# Altium PCB PCB1.PcbDoc
Units mil, origin at the board's own origin, x right, y up, seen from the top; angles counter-clockwise.
Board outline 1605 x 1345 mil, 2 copper layers (Top Layer, Bottom Layer), stack 67.356 mil thick; 9 components, 11 nets, 32 pads, 2 vias.
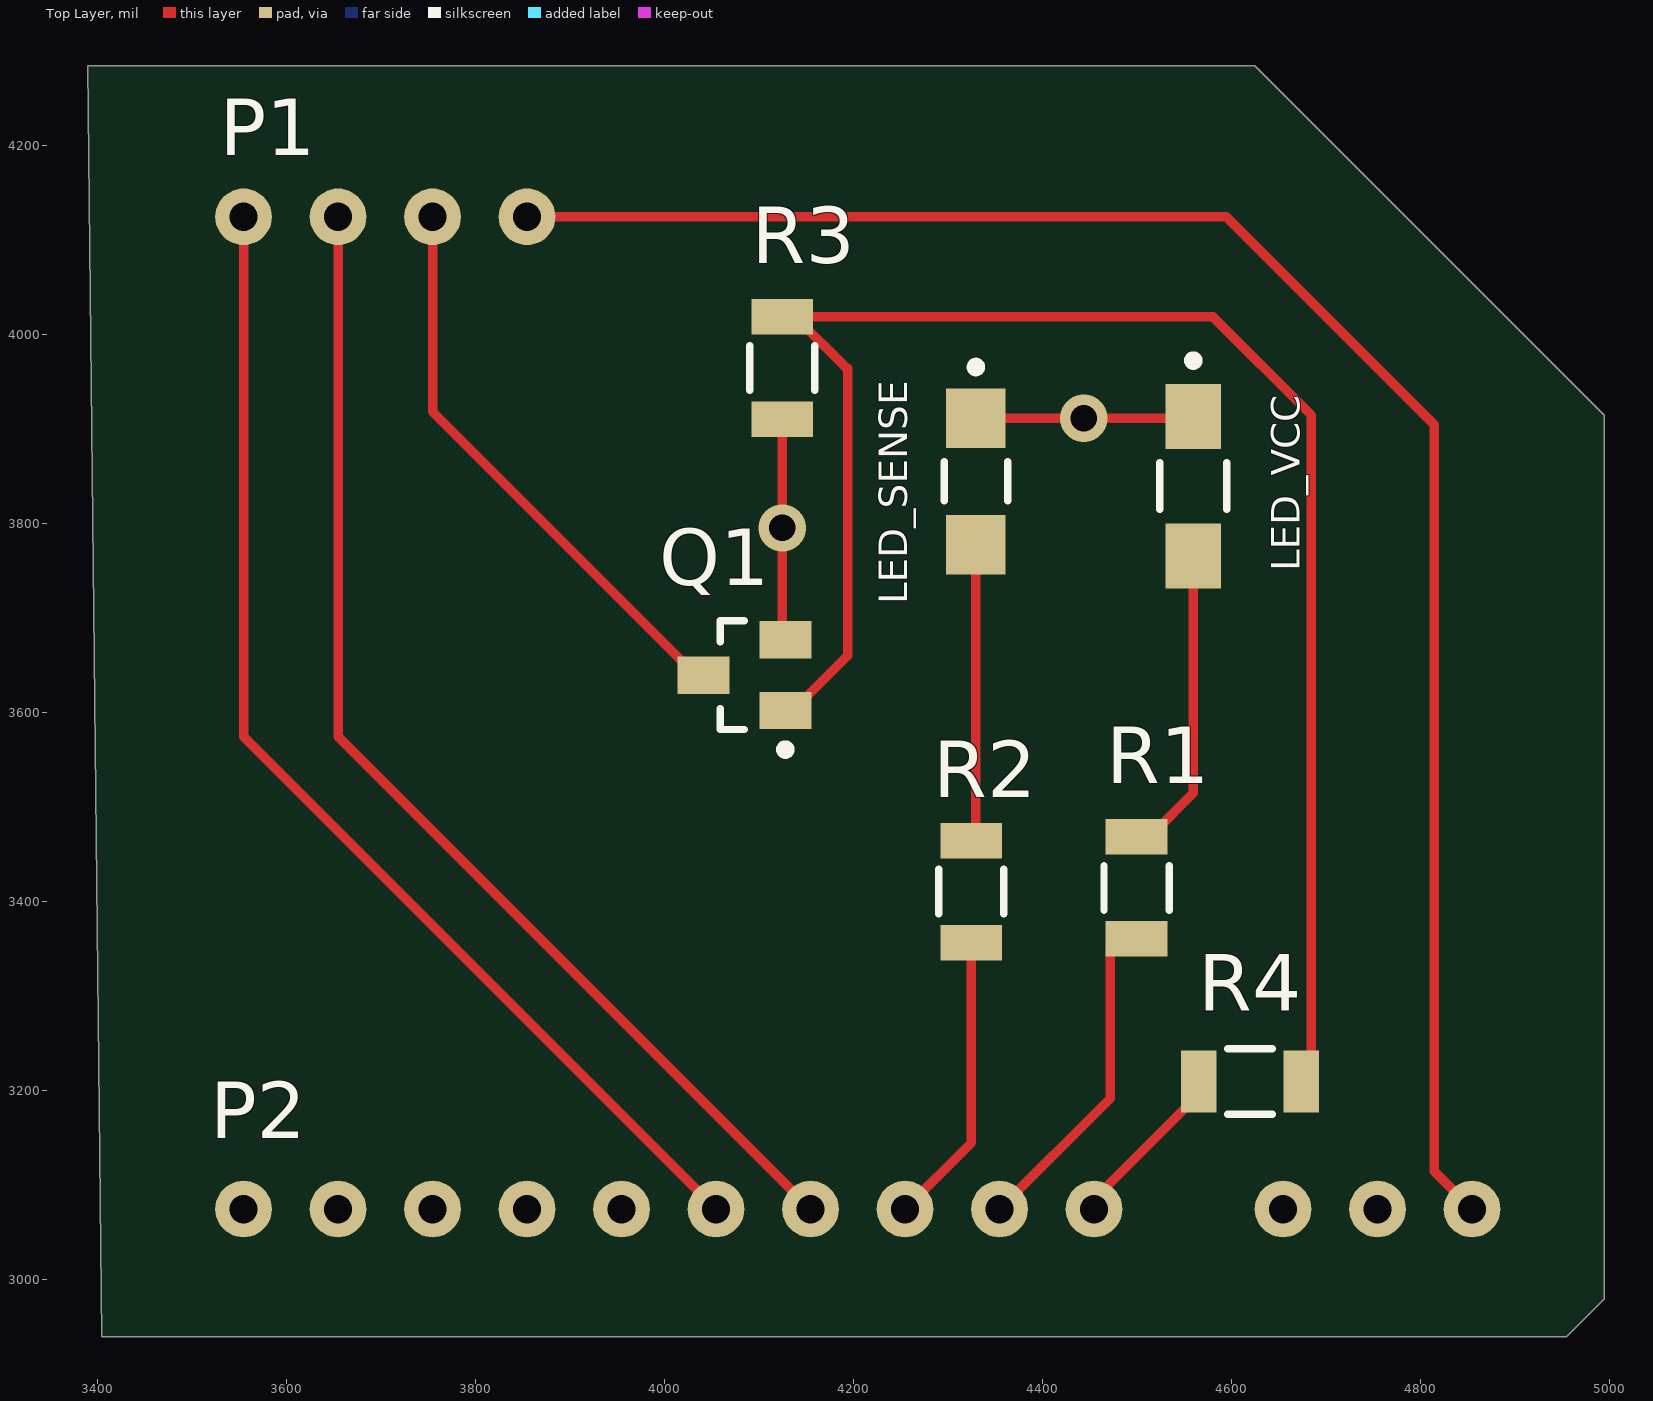
[diagram p0: Top Layer view]
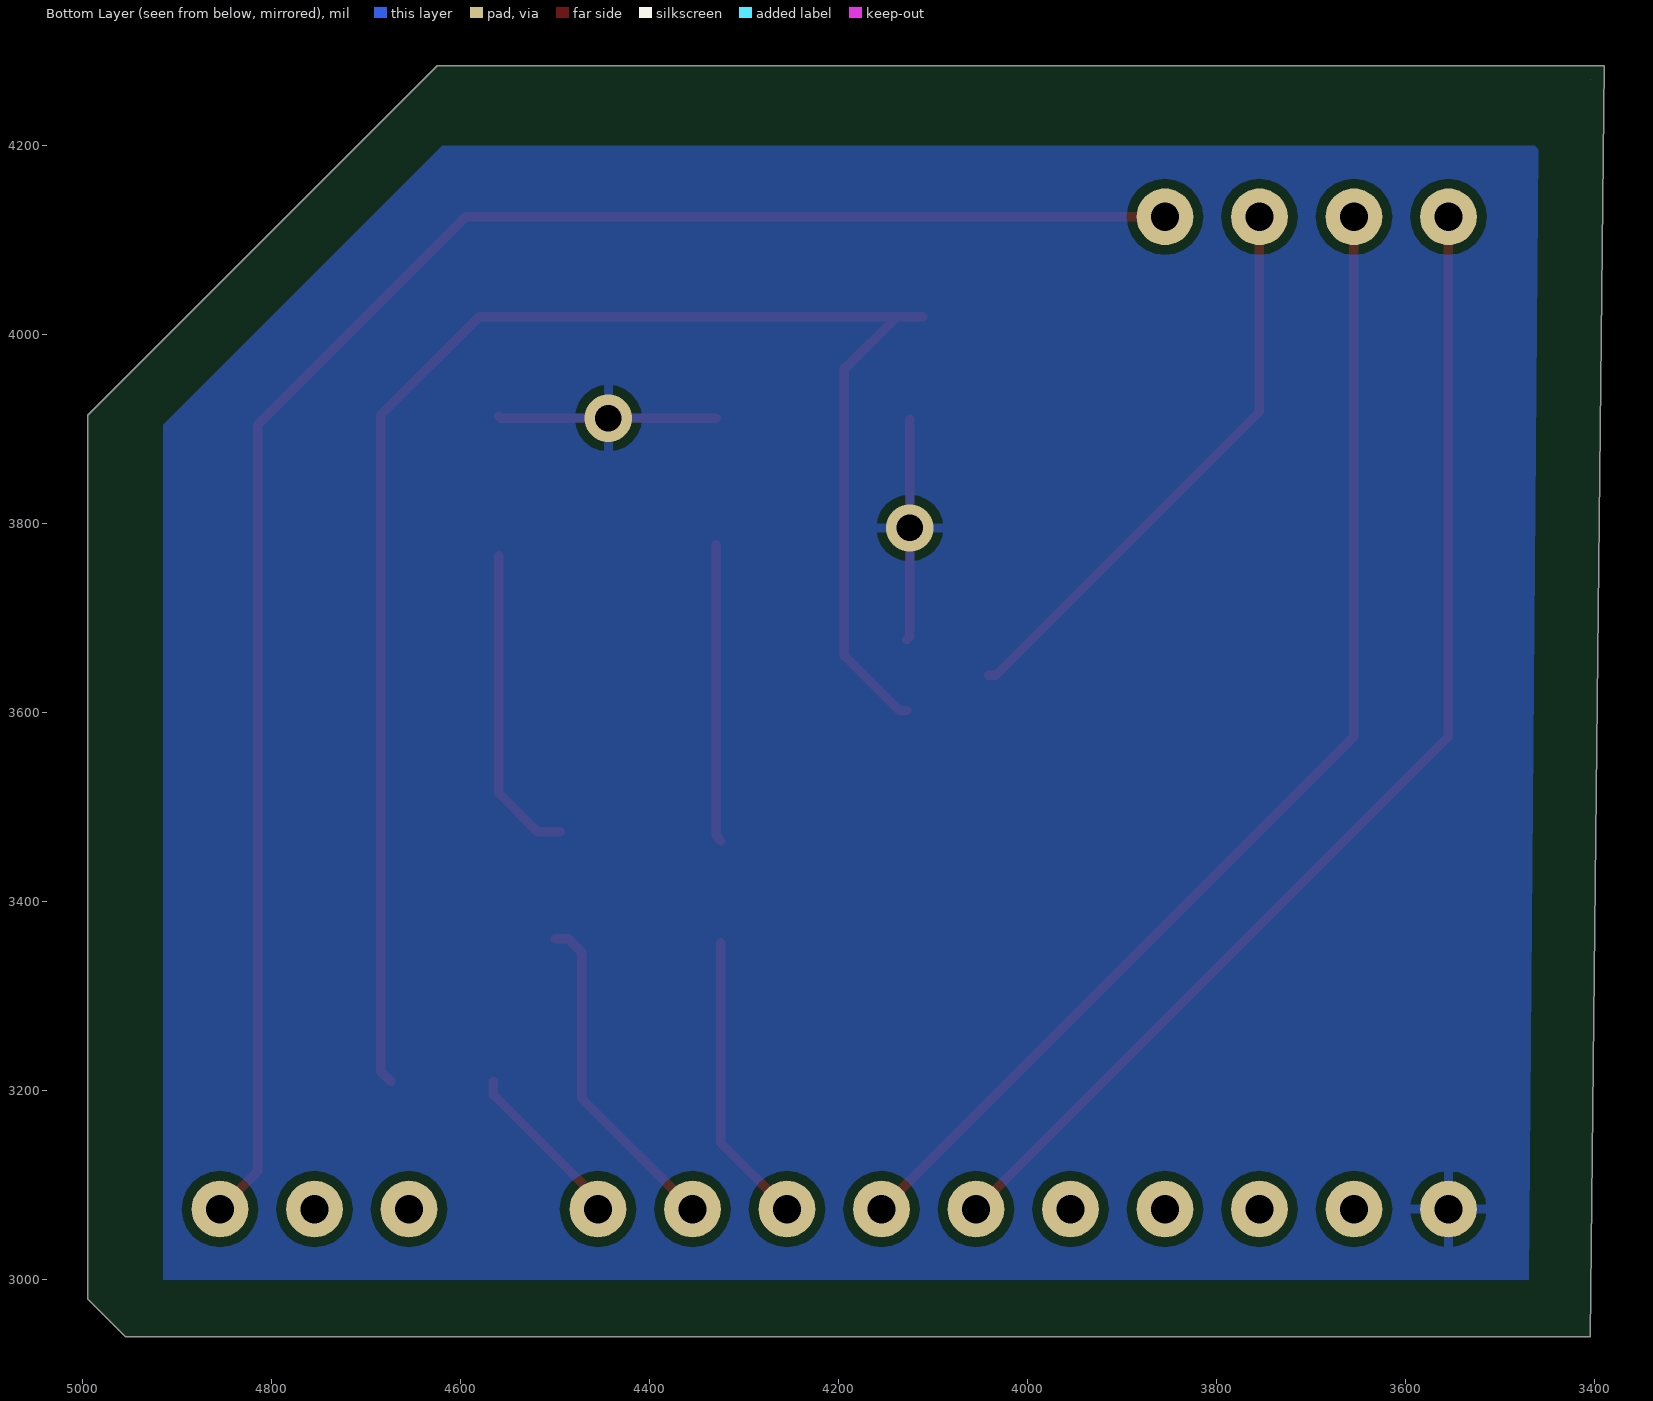
[diagram p1: Bottom Layer view, seen from below]

## Layer stack, top to bottom
Top Solder: solder mask 1, SM-001, Dk 4
Top Layer: signal copper 1.378
Dielectric 2: prepreg 2.8, PP-006, Dk 4.1
Dielectric 1: core 59, Core-043, Dk 4.3
Dielectric 3: prepreg 2.8, PP-006, Dk 4.1
Bottom Layer: signal copper 1.378
Bottom Solder: solder mask 1, SM-001, Dk 4

## Board outline
3390,4285 4625,4285 4995,3915 4995,2980 4955,2940 3425,2940 3415,2940 3405,2940
cut-out: 3405,4270

## Design rules (kind name [scope] priority, off if disabled: settings)
Clearance [All] p1: gap=10 ignorepadtopadclearanceinfootprint=FALSE except(0: Arc-Hole Track-Hole SMDPad-Hole THPad-Hole Via-Hole Fill-Hole Poly-Hole Region-Hole Text-Hole)
PlaneConnect [All] p1: pad.planeconnectstyle=Relief pad.reliefexpansion=20 pad.reliefentries=4 pad.reliefconductorwidth=10 pad.reliefairgap=10 via.planeconnectstyle=Direct via.reliefexpansion=20 via.reliefentries=4 via.reliefconductorwidth=10 via.reliefairgap=10
PolygonConnect [All] p1: connectstyle=Relief reliefconductorwidth=10 reliefentries=4 polygonreliefangle="90 Angle" airgapwidth=10
RoutingVias [All] p1: holewidth=28 width=50 viastyle="Through Hole" minholewidth=28 minwidth=50 maxholewidth=28 maxwidth=50
SolderMaskExpansion [All] p1: expansion=4 istentingtop=FALSE
Width [All] p1: maxlimit=10 minlimit=10 preferedwidth=10
29 further rules are at their usual default settings.

## Components (designator, comment, footprint, x,y, rotation, side; value= is the part's Value field where it differs from the comment)
LED_SENSE "APTL3216SURCK" FP-APTL3216SURCK-MFG 4330,3845 r270 top
LED_VCC "APTD3216CGCK" FP-APTD3216CGCK-MFG 4560,3840 r270 top
P1 "Temp Sensor" PCBComponent_1 3655,4325 r180 top
P2 "Launchpad" "MSP430 Launchpad" 3555,1275 r0 top
Q1 "BSS123" FAIR-SOT23-3_V 4085,3640 r90 top
R1 "RC3216J103CS" FP-RC3216-IPC_C 4500,3415 r90 top
R2 "RC3216J103CS" FP-RC3216-IPC_C 4325,3410.84 r90 top
R3 "RC3216J103CS" FP-RC3216-IPC_C 4125,3965 r270 top
R4 "RC3216J103CS" FP-RC3216-IPC_C 4620,3210 r0 top

## Footprints (in the part's own frame and the unit in brackets; to place one, negate y for a bottom-side part, rotate by r counter-clockwise, add the part's x,y. Pads: shape width x height; smd on the part's side, far side on the other; paste and mask are expansions set on the pad)
FAIR-SOT23-3_V [mm] "SOT23, 3-Leads, Body 2.92x1.3mm, Pitch 0.95mm"
  rect 1x1.4 smd: 1(-0.95,-1.1) 2(0.95,-1.1) 3(0,1.1)
  silkscreen extent -2.12,-1.23 1.46,0.65, body extent -1.46,-0.65 1.46,0.65, height 1.2
FP-APTD3216CGCK-MFG [mm]
  rect 1.75x1.5 smd paste+0 mask+0: 1(-1.875,0) 2(1.875,0)
  silkscreen extent -3.5,-0.9 0.63,0.9, body extent -2.85,-1 2.85,1, height 0.25
FP-APTL3216SURCK-MFG [mm]
  rect 1.6x1.6 smd paste+0 mask+0: 1(-1.7,0) 2(1.7,0)
  silkscreen extent -3.2,-0.85 0.53,0.85, body extent -2.6,-0.95 2.6,0.95, height 0.25
FP-RC3216-IPC_C [mil]
  rect 37.59x65.28 smd paste+0 mask+0: 1(-54.16,0) 2(54.16,0)
  silkscreen extent -24,-34 24,34, body extent -77,-38 77,38, height 10
"MSP430 Launchpad" [mil]
  round 60 hole 30: 11(900,1800) 12(800,1800) 13(700,1800) 14(600,1800) 15(500,1800) 16(400,1800) 17(300,1800) 18(200,1800) 19(100,1800) 20(0,1800) 21(1100,1800) 22(1200,1800) 23(1300,1800)
PCBComponent_1 [mil]
  round 60 hole 30: 1(-200,200) 2(-100,200) 3(0,200) 4(100,200)

## Part data
LED_SENSE: library part CMP-44529-000007-1, "LED RED CLEAR CHIP SMD", Colour=Red, Forward Current=20mA, Forward Voltage=1.95V, Manufacturer=Kingbright, Max Junction Temp=+115°C, Power Dissipation=75mW, Reverse Voltage=5V, Temperature="-40°C to +85°C", Temperature Range High=+85°C, Temperature Range Low=-40°C, Automotive=No, Category=Diode, ComponentLink2Description=Datasheet, ComponentLink2URL=http://www.kingbrightusa.com/images/catalog/SPEC/APTL3216SURCK.pdf, Device Class L1=Optoelectronics, Device Class L2=LEDs, Device Class L3=unset, Digikey Description="LED RED CLEAR CHIP SMD", Height=1.2mm, Lead Free=Yes, Led Orientation="Top View", Luminous Intensity=550mcd, Manufacturer Part Number=APTL3216SURCK, Mouser Description="APTL3216SURCK Red LED; 630 nm 3216 (1206); Round Lens SMD package", Octopart=https://octopart.com/aptl3216surck-kingbright-5355676, Package=APTL3216SURCK, Peak Emmision Wavelength=645nm, RoHS=TRUE, Viewing Angle=80°, Wavelength=630nm
LED_VCC: library part CMP-44529-000049-1, "LED GREEN CLEAR 2SMD", Case Code (Imperial)=1206, Case Code (Metric)=3216, Color=Green, Forward Current=20mA, Forward Voltage=2.1V, Lens Color=Clear, Max Operating Temperature=85°C, Min Operating Temperature=-40°C, Package Quantity=2000, Case/Package=1206, Dominant Wavelength=570nm, Height=1.8mm, Illumination Color=Green, Lead Free="Lead Free", Length=3.2mm, Lens Style=Clear, Luminous Intensity=300mcd, Mount="Surface Mount", Number of LEDs=1, Number of Pins=2, Packaging="Tape and Reel", Test Current=20mA, Viewing Angle=50°, Width=1.6mm
P1: library part Component_1
P2: "MSP430G2XX, LAUNCHPAD, FLASH EMULATION, DEV KIT", Manufacturer="Texas Instruments", Manufacturer Part Number=MSP-EXP430G2, Package Quantity=1, Supplier Part Number 1=39AH9021, Category="Embedded Processors and Controllers", ComponentLink1Description=https://datasheet.ciiva.com/2398/slay017-2398228.pdf?src-supplier=Digi-Key, ComponentLink1URL=https://datasheet.ciiva.com/2398/slay017-2398228.pdf?src-supplier=Digi-Key, ComponentLink2Description=https://datasheet.ciiva.com/27059/2207275-27059764.pdf?src-supplier=Jameco, ComponentLink2URL=https://datasheet.ciiva.com/27059/2207275-27059764.pdf?src-supplier=Jameco, ComponentLink3Description=https://datasheet.ciiva.com/20167/73-4724-20167738.pdf?src-supplier=Rapid+Electronics, ComponentLink3URL=https://datasheet.ciiva.com/20167/73-4724-20167738.pdf?src-supplier=Rapid+Electronics, ComponentLink4Description=https://datasheet.ciiva.com/26344/414784-da-01-en-launchpad-devel-tool-msp-exp430g2-tid-26344585.pdf?src-supplier=Conrad, ComponentLink4URL=https://datasheet.ciiva.com/26344/414784-da-01-en-launchpad-devel-tool-msp-exp430g2-tid-26344585.pdf?src-supplier=Conrad, Core Architecture=MSP430, Data Bus Width=16b, Evaluation Kit=Yes, Height=1.97inch, Interface=USB, Length=3.94inch, Mount=Socket, Number of Bits=16, Number of Pins=0.7, Packaging=Bulk, Radiation Hardening=No, REACH SVHC="No SVHC", RoHS=Yes, Supplier 1=Newark, Weight=0.22lb, Width=3.94inch
Q1: library part CMP-2000-04934-1, "N-Channel Logic Level Enhancement Mode Field Effect Transistor, 1.7 V, -55 to 150 degC, 3-Pin SOT-23, RoHS, Tape and Reel", Manufacturer=Fairchild, Maximum Continuous Drain Current=0.17A, Maximum Drain Source Voltage=100V, Maximum Gate Source Voltage=±20V, Operating temperature=-55to150degC, Package=3SOT-23, Package Description="3-Pin Small Outline Transistor, Body 2.92 x 1.325 mm, Pitch 0.95 mm", Package Reference=SOT23-3, Package Version="Rev. 12, 03/2016", Category=MOSFET, Channel Mode=Enhancement, Channel Type=N, Datasheet URL=https://www.fairchildsemi.com/datasheets/BS/BSS123.pdf, Datasheet Version=Jun-03, Manufacturer URL=https://www.fairchildsemi.com/, Mounting=SurfaceMount, Package URL=http://www.fairchildsemi.com/dwg/MA/MA03D.pdf, Packaging=Tape&Reel, Rad Hard=No, RDS-on=6000@10VmOhm, Typical Fall Time=2.4ns, Typical Rise Time=9ns, Typical Turn-Off Delay Time=17ns, Typical Turn-On Delay Time=1.7ns
R1 R2 R3 R4: library part CMP-13261-005388-1, "Res Thick Film 1206 10kΩ 5% 0.25W ±100ppm/°C Molded SMD T/R", Case Code (Imperial)=1206, Case Code (Metric)=3216, Max Operating Temperature=155°C, Max Power Dissipation=250mW, Min Operating Temperature=-55°C, Resistance=10kR, Temperature Coefficient=100ppm/°C, Tolerance=5%, Voltage Rating (DC)=200V, Case/Package=1206, Composition="Thick Film", Contact Plating=Tin, Depth=1.6mm, Features="Moisture Resistant", Height=0.026inch, Lead Free="Lead Free", Length=0.126inch, Military Standard=Not, Number of Terminations=2, Packaging="Tape and Reel", Radiation Hardening=No, Width=0.063inch

## Via types
v1: diameter 50, hole 28, Top Layer to Bottom Layer, 2 vias

## Nets (pads, with @x,y where several pads share a name; then routed paths per layer and width w, separated by ;. In a path a pad name is that pad's centre, name@x,y a point inside that pad or via, vN(x,y) a via of type N, cw(c..) or ccw(c..) an arc to the next point about the centre after c; other vN are vias at no path point)
GND: LED_SENSE.1 LED_VCC.1 P2.20 Q1.2 R3.2 | length 465.6
  Top Layer w10: R3.2 4125,3680.71 Q1.2 ; LED_SENSE.1 4558.11,3911.93 LED_VCC.1
  other v1: 4125,3795.77 4444.06,3911.93
LED_SENSE1: P2.13 R2.1 | length 310.7
  Top Layer w10: P2.13 4325,3145 R2.1
LED_SENSE2: LED_SENSE.2 R2.2 | length 315.1
  Top Layer w10: R2.2 4330,3470 LED_SENSE.2
LED_VCC1: P2.12 R1.1 | length 354
  Top Layer w10: P2.12 4472.36,3192.36 4472.36,3347.04 4486.16,3360.84 R1.1
LED_VCC2: LED_VCC.2 R1.2 | length 332.9
  Top Layer w10: R1.2@4495,3474.16 4518.84,3474.16 4560,3515.31 LED_VCC.2
NFET_DRAIN: P1.2 Q1.3 | length 608.4
  Top Layer w10: P1.2 3755,3918.82 4033.82,3640 Q1.3
NFET_GATE1: P2.11 R4.1 | length 180.9
  Top Layer w10: P2.11 4455,3085.31 4565.84,3196.16 R4.1
NFET_GATE2: Q1.1 R3.1 R4.2 | length 1798.5
  Top Layer w10: R3.1@4111.16,4019.16 R3.1 R3.1@4138.84,4019.16 ; Q1.1 4136.18,3602.6 4194.14,3660.56 4194.14,3965 4193,3965 R3.1@4138.84,4019.16 ; R4.2 4685,3220.84 4685,3915 4580.84,4019.16 R3.1@4138.84,4019.16
SCL: P1.3 P2.14 | length 1257.1
  Top Layer w10: P1.3 3655,3575 P2.14
SDA: P1.4 P2.15 | length 1257.1
  Top Layer w10: P1.4 3555,3575 P2.15
VCC: P1.1 P2.23 | length 1897.7
  Top Layer w10: P1.1 4595,4125 4815.22,3904.78 4815.22,3114.78 P2.23
pads on no net: P2.16 P2.17 P2.18 P2.19 P2.21 P2.22

## Polygon pours and split planes (outlines as drawn)
GND on Bottom Layer "GND_L02_P000" (solid, pour order 0): 3460,4200 3475,4200 4620,4200 4915,3905 4915,3000 3470,3000